# Altium PCB Copy of PCB3_1.PcbDoc
Units mm, origin at the board's own origin, x right, y up, seen from the top; angles counter-clockwise.
Board outline 66 x 100 mm, 4 copper layers (Top Layer, Int1 (GND), Int2 (PWR), Bottom Layer), stack 1.369 mm thick; 75 components, 64 nets, 288 pads, 183 vias.
Unrouted connection lines stored in the file: 38.
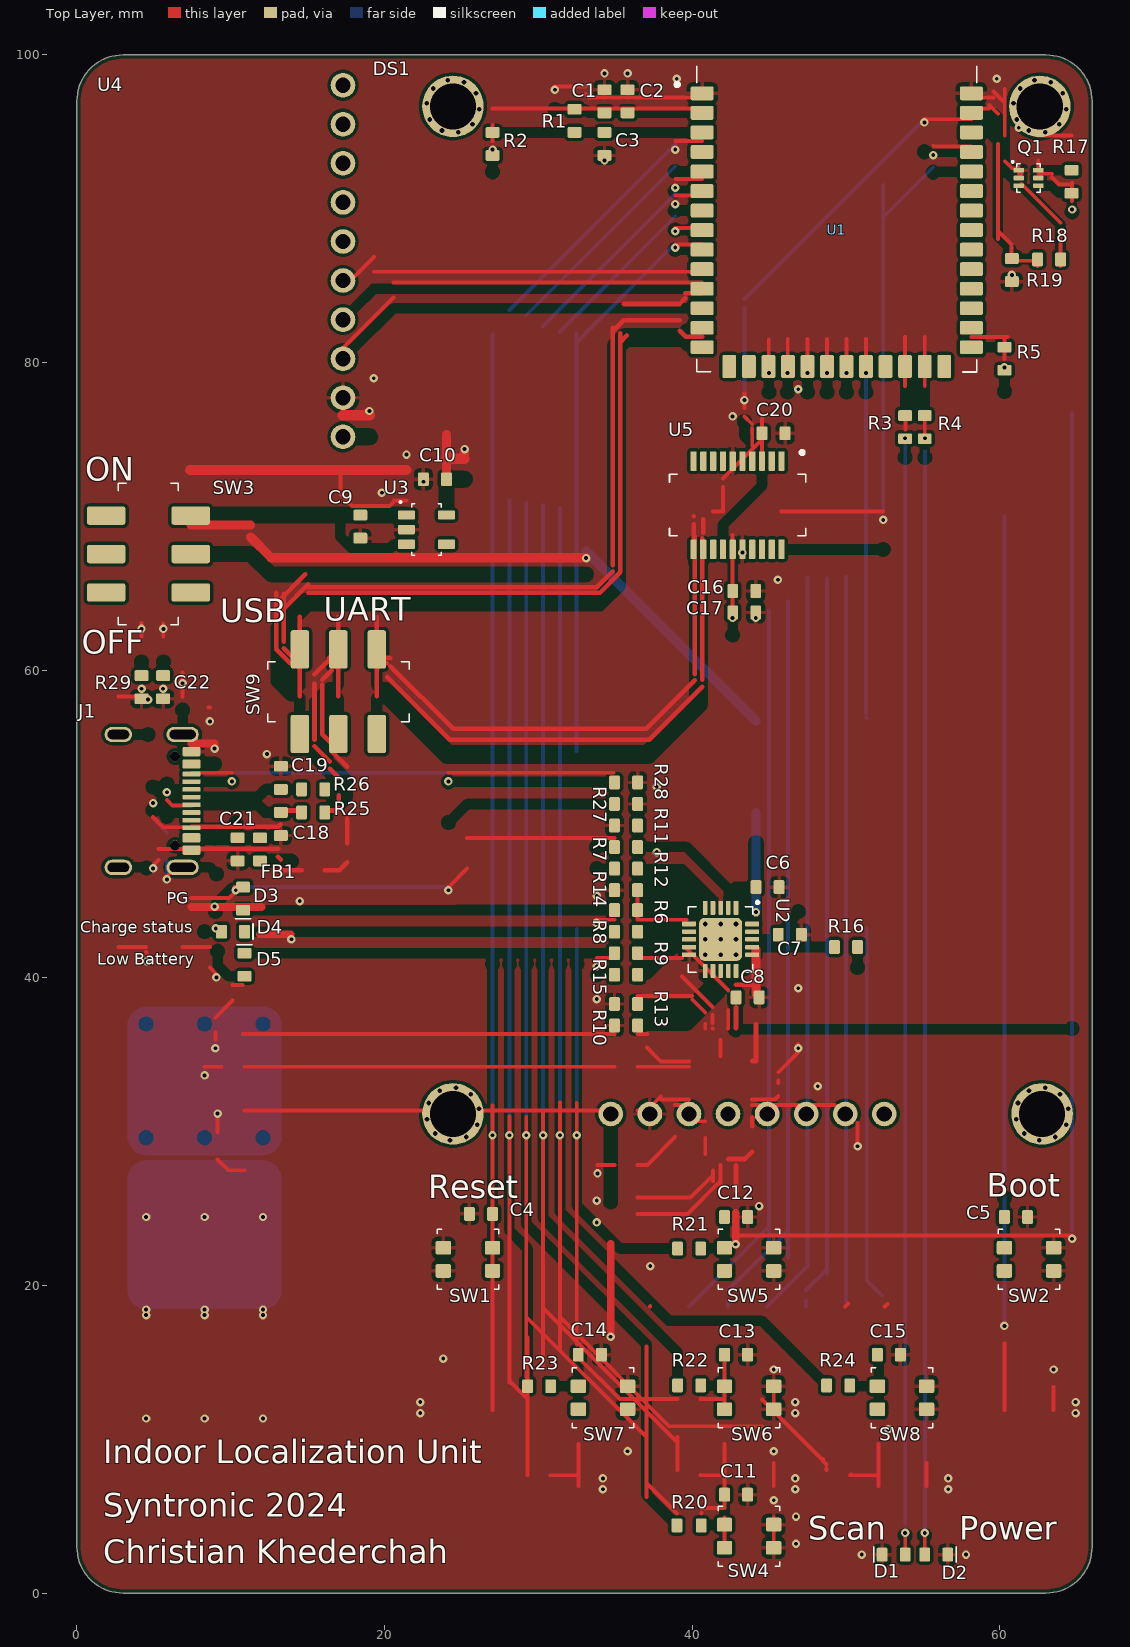
[diagram p0: Top Layer view]
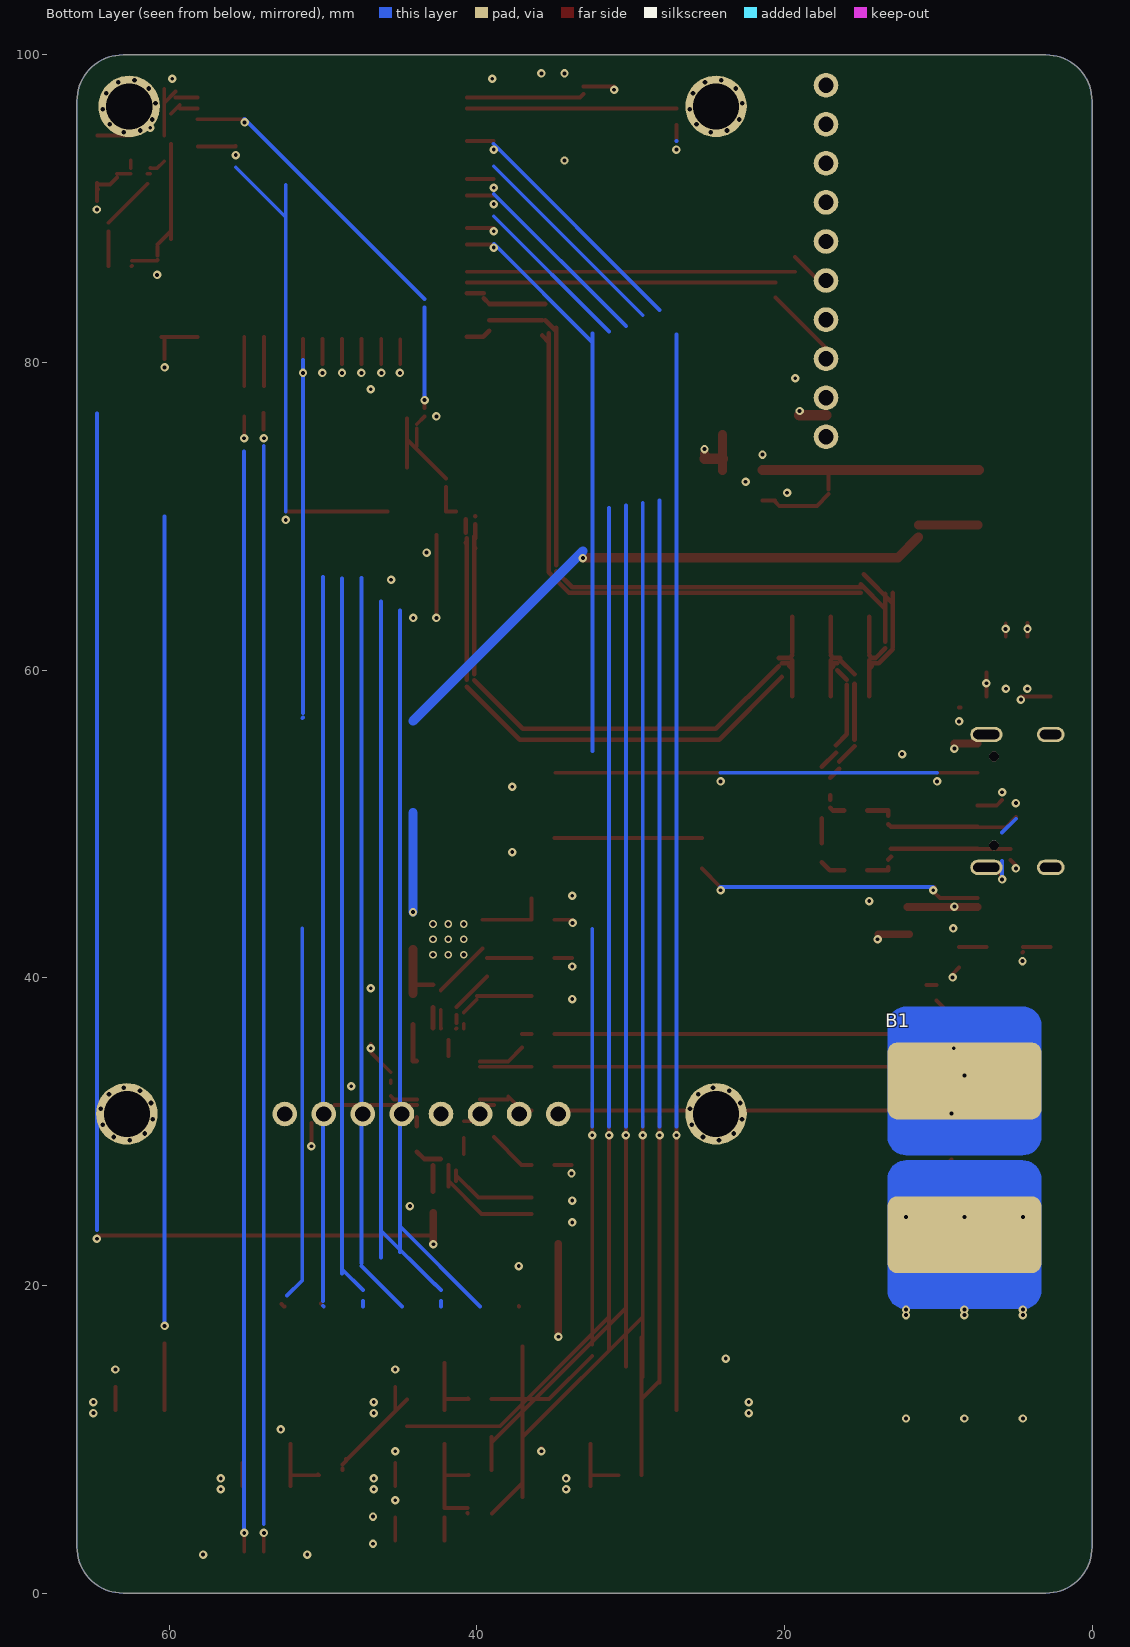
[diagram p1: Bottom Layer view, seen from below]
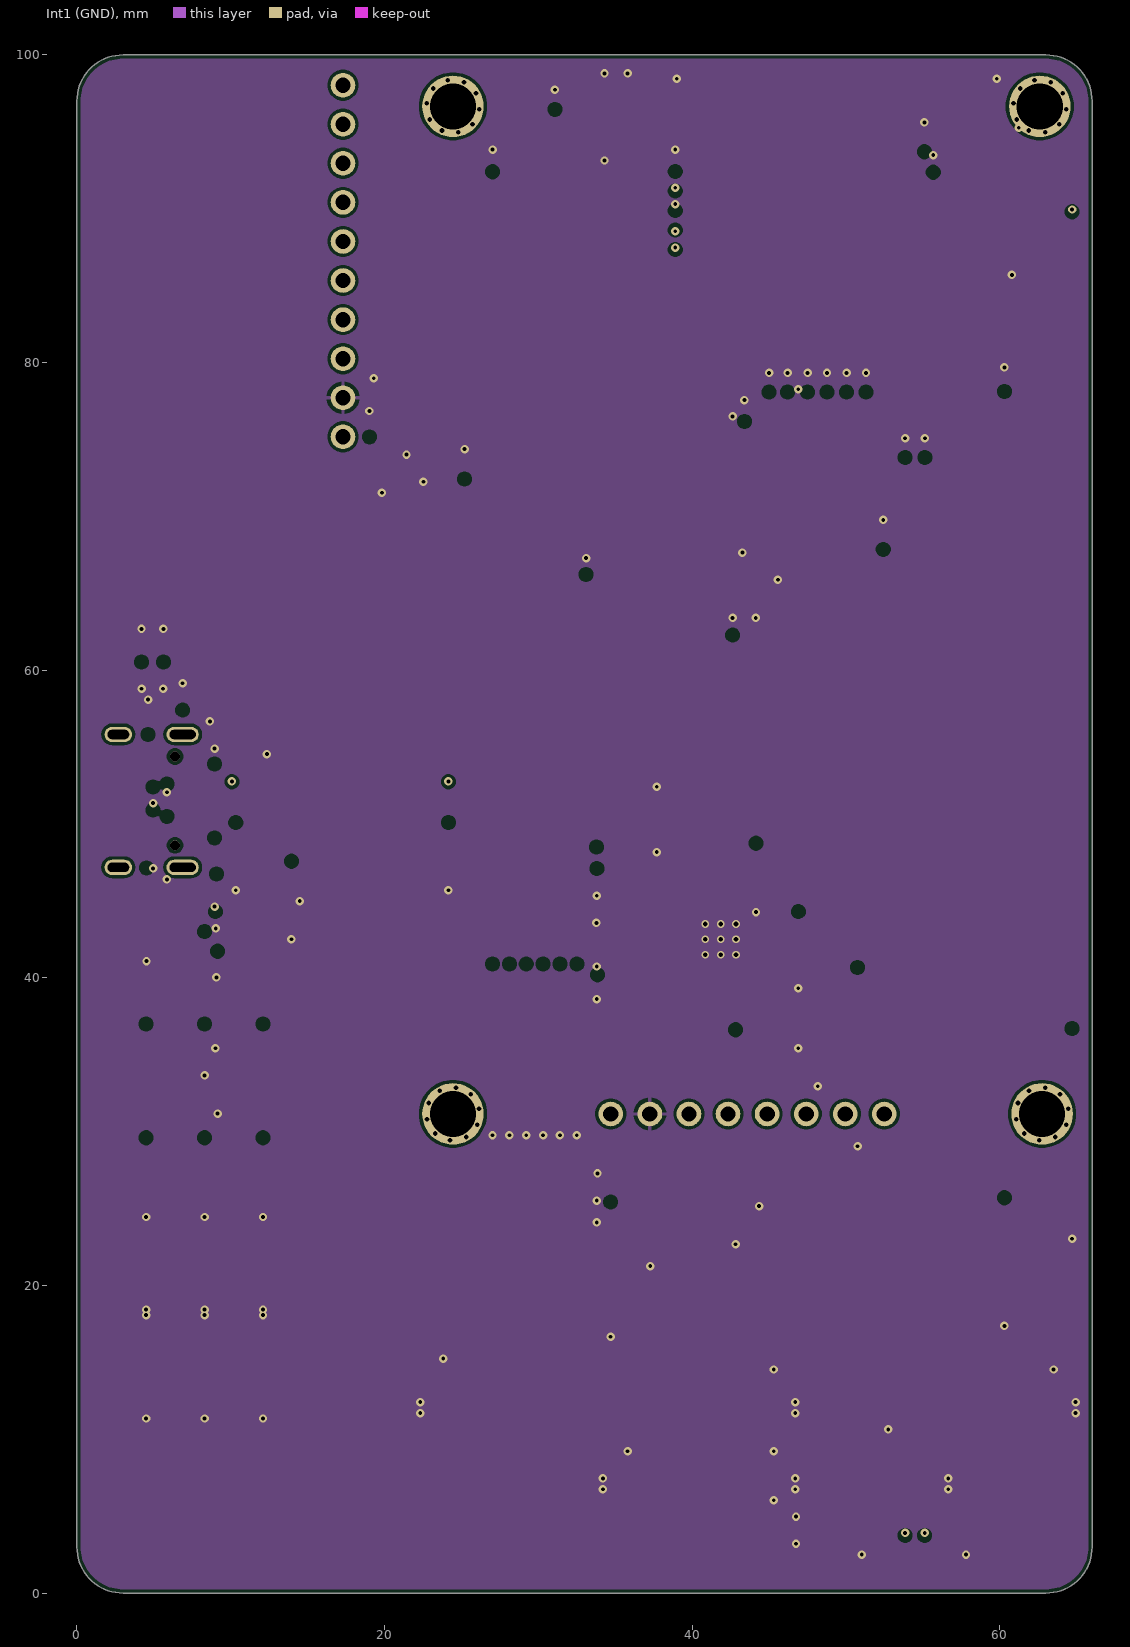
[diagram p2: Int1 (GND)]
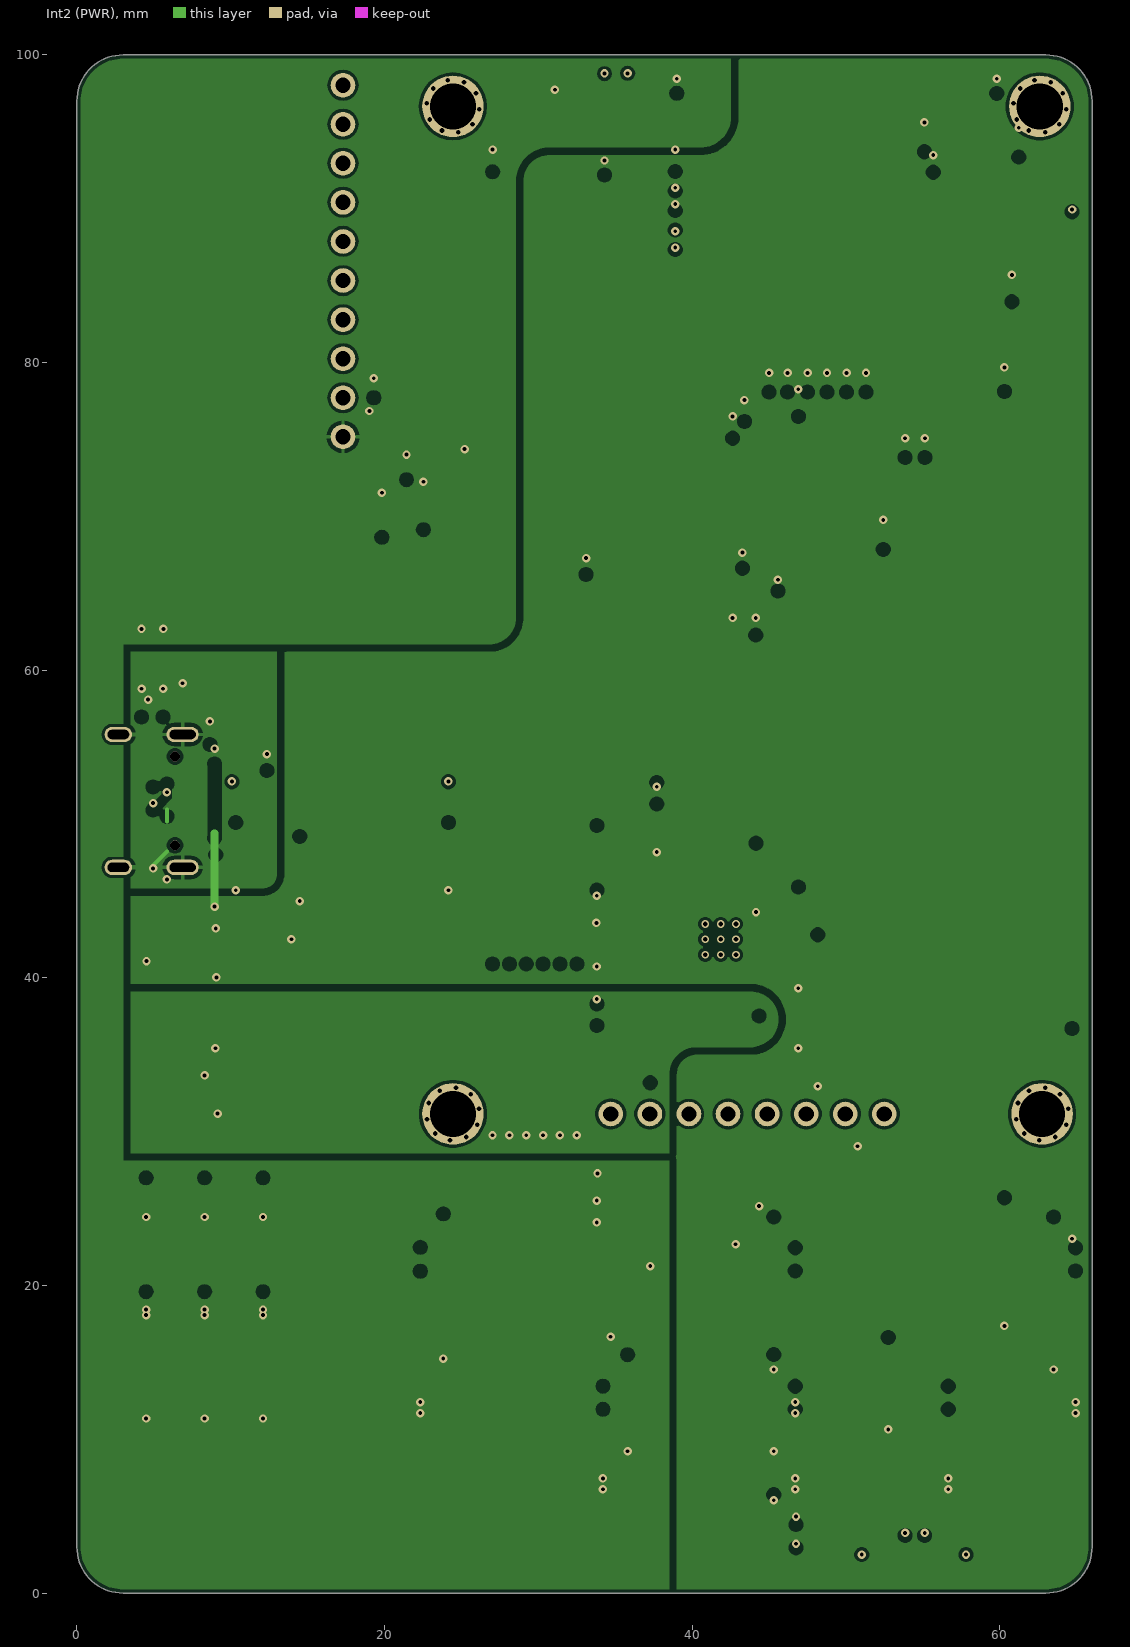
[diagram p3: Int2 (PWR)]

## Layer stack, top to bottom
Top Solder: solder mask 0.025, SM-001, Dk 4
Top Layer: signal copper 0.035
Dielectric 1: prepreg 0.1295, PP-017, Dk 4.3
Dielectric 2: prepreg 0.1295, PP-017, Dk 4.3
Int1 (GND): signal copper 0.035
Dielectric 3: core 0.7112, Core-039, Dk 4.8
Int2 (PWR): signal copper 0.035
Dielectric 4: prepreg 0.1295, PP-017, Dk 4.3
Dielectric 5: prepreg 0.1295, PP-017, Dk 4.3
Bottom Layer: signal copper 0.035
Bottom Solder: solder mask 0.025, SM-001, Dk 4

## Board outline
0,3 0,97 cw(c3,97) 3,100 63,100 cw(c63,97) 66,97 66,3 cw(c63,3) 63,0 3,0 cw(c3,3)

## Design rules (kind name [scope] priority, off if disabled: settings)
BoardOutlineClearance [All] p1: gap=0.25 ignorepadtopadclearanceinfootprint=FALSE except(0: Arc-SplitContinuation Track-SplitContinuation SMDPad-SplitContinuation THPad-SplitContinuation Via-SplitContinuation Fill-SplitContinuation Poly-SplitContinuation Region-SplitContinuation Text-SplitContinuation)
Clearance [All] p1: gap=0.2 ignorepadtopadclearanceinfootprint=FALSE except(0.5: Fill-Fill Fill-Poly Fill-Region Poly-Poly Poly-Region Region-Region)
DiffPairsRouting [All] p1: maxlimit=0.2 minlimit=0.127 mostfreqgap=0.2 toplayer_mingap=0.2 toplayer_minwidth=0.3 toplayer_maxwidth=0.3 toplayer_prefwidth=0.3 midlayer1_maxgap=0.127 midlayer1_prefgap=0.127 midlayer1_minwidth=0.113 midlayer1_maxwidth=0.113 midlayer1_prefwidth=0.113 midlayer2_maxgap=0.127 midlayer2_prefgap=0.127 midlayer2_minwidth=0.113 midlayer2_maxwidth=0.113 midlayer2_prefwidth=0.113 bottomlayer_mingap=0.2 bottomlayer_minwidth=0.3 bottomlayer_maxwidth=0.3 bottomlayer_prefwidth=0.3 impedanceprofiledriven=TRUE impedanceprofileid={8352E104-22B4-4ABE-B9B5-B5B13E8F82C1} impedanceprofilevalue=90.000000 maxuncoupledlength=2
MatchedLengths MatchedLengths_USB_DiffPairs [All] p1: tolerance=0.127 checknetsindiffpair=TRUE checkdiffpairvsdiffpair=FALSE checkxsignals=FALSE checkothers=FALSE
PolygonConnect [All] p1: thpad.connectstyle=Relief thpad.reliefconductorwidth=0.254 thpad.reliefentries=4 thpad.polygonreliefangle="90 Angle" thpad.airgapwidth=0.254 smdpad.connectstyle=Relief smdpad.reliefconductorwidth=0.254 smdpad.reliefentries=4 smdpad.polygonreliefangle="90 Angle" smdpad.airgapwidth=0.254 via.connectstyle=Direct via.reliefconductorwidth=0.254 via.reliefentries=4 via.polygonreliefangle="90 Angle" via.airgapwidth=0.254
RoutingVias [All] p1: holewidth=0.25 width=0.55 viastyle="Through Hole" minholewidth=0.25 minwidth=0.55 maxholewidth=0.25 maxwidth=0.55
SolderMaskExpansion [All] p1: expansion=0.102 istentingtop=FALSE
Width [All] p1: maxlimit=1 minlimit=0.25 preferedwidth=0.25 minimp=50.000000 maximp=50.000000 favimp=50.000000
29 further rules are at their usual default settings.

## Classes and differential pairs
component class Power: B1 C6 C7 C8 C9 C10 D3 D4 D5 Q1 R6 R7 R8 R9 R10 R11 R12 R13 R14 R15 R16 R17 R18 R19 SW3 U2 U3
component class MCU: 2 C1 C2 C3 C4 C5 D1 D2 R1 R2 R3 R4 R5 SW1 SW2 U1
component class COM: C16 C17 C18 C19 C20 C21 C22 FB1 J1 R25 R26 R27 R28 R29 SW9 U5
component class Peripherals: C11 C12 C13 C14 C15 DS1 R20 R21 R22 R23 R24 SW4 SW5 SW6 SW7 SW8 U4
differential pair C: +C_p -C_n
differential pair A: +A_p -A_n
differential pair B: +B_p -B_n
differential pair D: +D_p -D_n

## Components (designator, comment, footprint, x,y, rotation, side; value= is the part's Value field where it differs from the comment)
B1 "1200mAh" battery 8.3,28.3 r270 bottom
C1 "22 μF" "Capacitor 0603" 34.3,96.98 r270 top
C2 "0.1 μF" "Capacitor 0603" 35.8,96.98 r270 top
C3 "1 μF" "Capacitor 0603" 34.3,94.21 r90 top
C4 "0.1 μF" "Capacitor 0603" 26.27,24.65 r0 top
C5 "0.1 μF" "Capacitor 0603" 61.05,24.45 r0 top
C6 "4.7 μF" "Capacitor 0603" 44.9,45.9 r180 top
C7 "10 μF" "Capacitor 0603" 46.35,42.8 r180 top
C8 "4.7 μF" "Capacitor 0603" 43.6,38.725 r0 top
C9 "4.7 μF" "Capacitor 0603" 18.428,69.335 r90 top
C10 "4.7 μF" "Capacitor 0603" 23.278,72.41 r180 top
C11 "0.1 μF" "Capacitor 0603" 42.85,6.4 r180 top
C12 "0.1 μF" "Capacitor 0603" 42.85,24.45 r180 top
C13 "0.1 μF" "Capacitor 0603" 42.85,15.5 r180 top
C14 "0.1 μF" "Capacitor 0603" 33.35,15.5 r180 top
C15 "0.1 μF" "Capacitor 0603" 52.79,15.5 r180 top
C16 "0.1 μF" "Capacitor 0603" 43.383,65.15 r180 top
C17 "4.7 μF" "Capacitor 0603" 43.383,63.75 r180 top
C18 "47 pF" "Capacitor 0603" 13.26,50 r90 top
C19 "47 pF" "Capacitor 0603" 13.26,53 r270 top
C20 "0.1 μF" "Capacitor 0603" 45.288,75.4 r180 top
C21 "10 nF" "Capacitor 0603" 10.45,48.35 r90 top
C22 "4.7 μF" "Capacitor 0603" 5.602,58.898 r90 top
D1 "Blue" "LED 0603" 53.095,2.5 r180 top
D2 "Green" "LED 0603" 55.865,2.5 r0 top
D3 "Green" "LED 0603" 10.8,45.15 r270 top
D4 "Blue" "LED 0603" 10.15,43 r0 top
D5 "Red" "LED 0603" 10.9,40.85 r90 top
DS1 "FT231XS-R" Screen 43.6,63.9 r90 top locked
FB1 "0.6kΩ" "Ferrite Bead 0603" 11.9,48.35 r270 top
J1 "USB4105-GF-A" USB4105-GF-A 7.45,51.5 r270 top
Q1 "DMC2400UV-7" "MOSFET N/P-CH" 61.865,92 r270 top
R1 "10kΩ" "Resistor 0603"#1 32.35,95.71 r270 top
R2 "0 Ω" "Resistor 0603"#1 27.025,94.21 r90 top
R3 "50 Ω" "Resistor 0603"#1 53.845,75.8 r90 top
R4 "50 Ω" "Resistor 0603"#1 55.115,75.8 r270 top
R5 "0 Ω" "Resistor 0603"#1 60.3,80.25 r270 top
R6 "0.47kΩ" "Resistor 0603"#1 35.7,44.4 r0 top
R7 "330kΩ" "Resistor 0603"#1 35.7,48.5 r180 top
R8 "0.47kΩ" "Resistor 0603"#1 35.7,43 r0 top
R9 "0.47kΩ" "Resistor 0603"#1 35.7,41.6 r0 top
R10 "4.7kΩ" "Resistor 0603"#1 35.7,36.9 r180 top
R11 "110kΩ" "Resistor 0603"#1 35.7,49.9 r0 top
R12 "4.7kΩ" "Resistor 0603"#1 35.7,47.1 r0 top
R13 "100kΩ" "Resistor 0603"#1 35.7,38.3 r180 top
R14 "10kΩ" "Thermistor 0603" 35.7,45.7 r180 top
R15 "4.7kΩ" "Resistor 0603"#1 35.7,40.2 r0 top
R16 "4.7kΩ" "Resistor 0603"#1 50,42 r180 top
R17 "110kΩ" "Resistor 0603"#1 64.665,91.75 r90 top
R18 "30kΩ" "Resistor 0603"#1 63.2,86.7 r0 top
R19 "110kΩ" "Resistor 0603"#1 60.781,86.01 r90 top
R20 "0 Ω" "Resistor 0603"#2 39.84,4.4 r180 top
R21 "0 Ω" "Resistor 0603"#1 39.8,22.4 r180 top
R22 "0 Ω" "Resistor 0603"#1 39.8,13.5 r180 top
R23 "0 Ω" "Resistor 0603"#1 30.05,13.45 r180 top
R24 "0 Ω" "Resistor 0603"#1 49.49,13.5 r180 top
R25 "27Ω" "Resistor 0603"#1 15.36,50.75 r0 top
R26 "27Ω" "Resistor 0603"#1 15.36,52.25 r0 top
R27 "5.1kΩ" "Resistor 0603"#1 35.7,51.3 r180 top
R28 "5.1kΩ" "Resistor 0603"#1 35.7,52.7 r180 top
R29 "100kΩ" "Resistor 0603"#1 4.202,58.898 r90 top
SW1 "R-667843" R-667843 25.42,21.7 r0 top
SW2 "R-667843" R-667843 61.9,21.7 r0 top
SW3 "JS202011SCQN" JS202011SCQN 4.65,67.55 r270 top
SW4 "R-667843" R-667843 43.7,3.7 r180 top
SW5 "R-667843" R-667843 43.7,21.7 r180 top
SW6 "R-667843" R-667843 43.7,12.7 r180 top
SW7 "R-667843" R-667843 34.2,12.7 r180 top
SW8 "R-667843" R-667843 53.64,12.7 r180 top
SW9 "JS202011SCQN" JS202011SCQN 17,58.6 r180 top
U1 "ESP32-S3-WROOM-1-N16" ESP32-C3-WROOM-1 49.4,97.5 r0 top
U2 "MCP73871T-2CCI/ML" MCP73871 41.85,42.5 r270 top
U3 "TLV75533PDBVR" TLV75533PDBVR 22.728,69.135 r0 top
U4 "YUMILI1otydzvg2c" GY-9250 17.3,86.6 r180 top
U5 "FT231XS-R" FT231XS-R 42.95,70.725 r180 top

## Footprints (in the part's own frame and the unit in brackets; to place one, negate y for a bottom-side part, rotate by r counter-clockwise, add the part's x,y. Pads: shape width x height; smd on the part's side, far side on the other; paste and mask are expansions set on the pad)
battery [mm]
  rrect25% 5x10 smd: +(-5,0) -(5,0)
"Capacitor 0603" [mm] "Capacitor0603"
  rrect25% 0.7x0.9 smd: A(-0.75,0) B(0.75,0)
  body extent -0.8,-0.4 0.8,0.4, height 0.9
ESP32-C3-WROOM-1 [mm] "MCU"
  rrect25% 1.5x0.9 smd: 1(-8.75,0) 2(-8.75,-1.27) 3(-8.75,-2.54) 4(-8.75,-3.81) 5(-8.75,-5.08) 6(-8.75,-6.35) 7(-8.75,-7.62) 8(-8.75,-8.89) 9(-8.75,-10.16) 10(-8.75,-11.43) 11(-8.75,-12.7) 12(-8.75,-13.97) 13(-8.75,-15.24) 14(-8.75,-16.51) 27(8.75,-16.51) 28(8.75,-15.24) 29(8.75,-13.97) 30(8.75,-12.7) 31(8.75,-11.43) 32(8.75,-10.16) 33(8.75,-8.89) 34(8.75,-7.62) 35(8.75,-6.35) 36(8.75,-5.08) 37(8.75,-3.81) 38(8.75,-2.54) 39(8.75,-1.27) 40(8.75,0)
  rrect25% 0.9x1.5 smd: 15(-6.985,-17.757) 16(-5.715,-17.757) 17(-4.445,-17.757) 18(-3.175,-17.757) 19(-1.905,-17.757) 20(-0.635,-17.757) 21(0.635,-17.757) 22(1.905,-17.757) 23(3.175,-17.757) 24(4.445,-17.757) 25(5.715,-17.757) 26(6.985,-17.757)
  silkscreen extent -10.49,-18.12 9.1,1.78, body extent -9,-18.01 9,7.49, height 3.25
"Ferrite Bead 0603" [mm] "Ferrite Bead 0603"
  rrect25% 0.7x0.9 smd: A(-0.75,0) B(0.75,0)
  body extent -0.8,-0.4 0.8,0.4, height 0.95
FT231XS-R [mil] "USB to UART Bridge"
  rrect25% 16x50 smd: 1(-112.5,-113) 2(-87.5,-113) 3(-62.5,-113) 4(-37.5,-113) 5(-12.5,-113) 6(12.5,-113) 7(37.5,-113) 8(62.5,-113) 9(87.5,-113) 10(112.5,-113) 11(112.5,113) 12(87.5,113) 13(62.5,113) 14(37.5,113) 15(12.5,113) 16(-12.5,113) 17(-37.5,113) 18(-62.5,113) 19(-87.5,113) 20(-112.5,113)
  silkscreen extent -174,-139 174,79, body extent -170,-118 171,118, height 69
GY-9250 [mm] "IMU"
  round 1.6 hole 1: 1(0,11.43) 2(0,8.89) 3(0,6.35) 4(0,3.81) 5(0,1.27) 6(0,-1.27) 7(0,-3.81) 8(0,-6.35) 9(0,-8.89) 10(0,-11.43)
  body extent -1.5,-12.7 13.5,12.7, height 6.1
JS202011SCQN [mm] "SWITCH SLIDE DPDT 300MA 6V"
  rrect25% 1.2x2.5 smd: 1(-2.5,-2.75) 2(0,-2.75) 3(2.5,-2.75) 4(-2.5,2.75) 5(0,2.75) 6(2.5,2.75)
  silkscreen extent -4.6,-1.95 4.6,1.95, body extent -4.5,-3.75 4.5,3.75, height 5.51
"LED 0603" [mm] "Resistor 0603"
  rrect25% 0.7x0.9 smd: A(-0.75,0) B(0.75,0)
  silkscreen extent 1.3,-0.5 1.3,0.5, body extent -0.8,-0.4 0.8,0.4, height 0.35
MCP73871 [mm]
  rrect25% 0.9x0.3 smd: 1(-2.05,1) 2(-2.05,0.5) 3(-2.05,0) 4(-2.05,-0.5) 5(-2.05,-1) 11(2.05,-1) 12(2.05,-0.5) 13(2.05,0) 14(2.05,0.5) 15(2.05,1)
  rrect25% 0.3x0.9 smd: 6(-1,-2.05) 7(-0.5,-2.05) 8(0,-2.05) 9(0.5,-2.05) 10(1,-2.05) 16(1,2.05) 17(0.5,2.05) 18(0,2.05) 19(-0.5,2.05) 20(-1,2.05)
  rrect25% 2.8x2.8 smd: 21(0,0)
  silkscreen extent -2.45,-2.1 2.12,2.45, body extent -2,-2 2,2, height 1
"MOSFET N/P-CH" [mm] "MOSFET N/P-CH"
  rrect25% 0.3x0.67 smd: 1(-0.5,-0.635) 2(0,-0.635) 3(0.5,-0.635) 4(-0.5,0.635) 5(0,0.635) 6(0.5,0.635)
  silkscreen extent -1.05,-1.03 0.91,0.76, body extent -0.8,-0.8 0.8,0.8, height 0.6
R-667843 [mm] "SWITCH TACTILE SPST-NO 0.05A 12V"
  rrect25% 1x0.9 smd: A(-1.6,-0.75) A(-1.6,0.75) B(1.6,-0.75) B(1.6,0.75)
  silkscreen extent -2,-1.95 2,1.95, body extent -1.95,-1.9 1.95,1.9, height 1.5
"Resistor 0603"#1 [mm] "Resistor 0603"
  rrect25% 0.7x0.9 smd: A(-0.75,0) B(0.75,0)
  body extent -0.8,-0.4 0.8,0.4, height 0.55
"Resistor 0603"#2 [mm] "Resistor 0603"
  rrect25% 0.7x0.9 smd: A(-0.75,0) B(0.83,0)
  body extent -0.8,-0.4 0.8,0.4, height 0.55
Screen [mm]
  round 1.6 hole 1: 1(-32.75,8.89) 2(-32.75,6.35) 3(-32.75,3.81) 4(-32.75,1.27) 5(-32.75,-1.27) 6(-32.75,-3.81) 7(-32.75,-6.35) 8(-32.75,-8.89)
  round 4 hole 3: X(-32.75,-19.15) X(-32.75,19.15) X(32.75,-19) X(32.75,19.15)
  body extent -35.25,-21.65 35.25,21.65, height 7
"Thermistor 0603" [mm] "Thermistor 0603"
  rrect25% 0.7x0.9 smd: A(-0.75,0) B(0.75,0)
  body extent -0.8,-0.4 0.8,0.4, height 0.9
TLV75533PDBVR [mm] "IC REG LINEAR 3.3V 500MA SOT23-5"
  rrect25% 1.1x0.6 smd: 1(-1.3,0.95) 2(-1.3,0) 3(-1.3,-0.95) 4(1.3,-0.95) 5(1.3,0.95)
  silkscreen extent -1.7,-1.67 0.96,1.8, body extent -1.4,-1.45 1.4,1.45, height 1.45
USB4105-GF-A [mm] "CONN RCPT TYPE C 6P SMD RA"
  round 0.65 hole 0.65 unplated: 36(-2.89,-1.075) 36(2.89,-1.075)
  rrect25% 0.6x1.15 smd: A1(-3.2,0) A4(-2.4,0) B1(3.2,0) B4(2.4,0)
  rrect25% 0.3x1.15 smd: A5(-1.25,0) A6(-0.25,0) A7(0.25,0) A8(1.25,0) B5(1.75,0) B6(0.75,0) B7(-0.75,0) B8(-1.75,0)
  oval 1x2.1 hole 0.6 slot 1.7 at 90 deg: SHELL(-4.32,-0.575) SHELL(4.32,-0.575)
  oval 1x1.8 hole 0.6 slot 1.4 at 90 deg: SHELL(-4.32,-4.755) SHELL(4.32,-4.755)
  body extent -4.47,-7.35 4.47,0.36, height 3.31

## Part data
B1: library part Battery, "Lipobatteri - 103040 - 1.200 mAh", Manufacturer=batterikungen, Manufacturer Part Number=103040, Supplier Part Number 1=827-016, Supplier 1=Batterikungen
C1: library part "22 μF 0603", "Capacitor 22 μF", Manufacturer="Murata Electronics", Manufacturer Part Number=GRM188R60G226MEA0D, Supplier Part Number 1=490-5526-1-ND, Supplier 1=Digikey
C2 C4 C5 C11 C12 C13 C14 C15 C16 C20: library part "0.1 μF 0603", "Capacitor 0.1 μF", Manufacturer="Samsung Electro-Mechanics", Manufacturer Part Number=CL10B104KB8NNWC, Supplier Part Number 1=1276-1935-1-ND, Supplier 1=Digikey
C3: library part "1 μF 0603", "Capacitor 1 μF", Manufacturer="Samsung Electro-Mechanics", Manufacturer Part Number=CL10A105KA8NNNC, Supplier Part Number 1=1276-1102-1-ND, Supplier 1=Digikey
C6 C8 C9 C10 C17 C22: library part "4,7 μF 0603", "Capacitor 4.7 μF", Manufacturer="Samsung Electro-Mechanics", Manufacturer Part Number=CL10A475KP8NNNC, Supplier Part Number 1=1276-1044-1-ND, Supplier 1=Digikey
C7: library part "10 μF 0603", "Capacitor 10 μF", Manufacturer="Samsung Electro-Mechanics", Manufacturer Part Number=CL10A106MQ8NNNC, Supplier Part Number 1=1276-1119-1-ND, Supplier 1=Digikey
C18 C19: library part "47 pF 0603", "Capacitor 47 pF", Manufacturer="Walsin Technology Corporation", Manufacturer Part Number=0603N470J500CT, Supplier Part Number 1=1292-1528-1-ND, Supplier 1=Digikey
C21: library part "10 nF 0603", "Capacitor 10 nF", Manufacturer="Samsung Electro-Mechanics", Manufacturer Part Number=CL10B103KB8NNNC, Supplier Part Number 1=1276-1009-1-ND, Supplier 1=Digikey
D1 D4: library part D.Blue, "Diode Blue", Manufacturer="Lite-On Inc.", Manufacturer Part Number=LTST-C193TBKT-5A, Supplier Part Number 1=160-1827-1-ND, Supplier 1=Digikey
D2 D3: library part D.Green, "Diode Green", Manufacturer="Lumex Opto/Components Inc.", Manufacturer Part Number=SML-LXFT0603GC-TR, Supplier Part Number 1=67-SML-LXFT0603GC-TRCT-ND, Supplier 1=Digikey
D5: library part D.Red, "Diode Red", Manufacturer="Lite-On Inc.", Manufacturer Part Number=LTST-C190KRKT, Supplier Part Number 1=160-1436-1-ND, Supplier 1=Digikey
DS1: library part LCD-screen, "240×320, General 2.4inch LCD Display Module, 65K RGB", Manufacturer="FTDI, Future Technology Devices International Ltd", Supplier Part Number 1=768-1129-1-ND, Manufacturer Part Number=FT231XS-R, Supplier 1=Waveshare
FB1: library part "FB 0.6 kΩ 0603", "Ferrite Bead 600 Ω", Manufacturer="Murata Electronics", Manufacturer Part Number=BLM18AG601SN1D, Supplier Part Number 1=490-1014-1-ND, Supplier 1=Digikey
J1: "CONN RCPT TYPE C 6P SMD RA", Manufacturer=GCT, Supplier Part Number 1=2073-USB4105-GF-ACT-ND, Manufacturer Part Number=USB4105-GF-A, Supplier 1=Digikey
Q1: "MOSFET N/P-CH 20V SOT563", Manufacturer="Diodes Incorporated", Supplier Part Number 1=DMC2400UV-7DICT-ND, Manufacturer Part Number=DMC2400UV-7, Supplier 1=Digikey
R1: library part "10 kΩ 0603", "Resistor 10000 Ω", Manufacturer="Stackpole Electronics Inc", Manufacturer Part Number=RMCF0603FT10K0, Supplier Part Number 1=RMCF0603FT10K0CT-ND, Supplier 1=Digikey
R2 R5 R20 R21 R22 R23 R24: library part "0 Ω 0603", "Resistor 0 Ω", Manufacturer="Stackpole Electronics Inc", Manufacturer Part Number=RMCF0603ZT0R00, Supplier Part Number 1=RMCF0603ZT0R00CT-ND, Supplier 1=Digikey
R3 R4: library part "0.05 kΩ 0603", "Resistor 50 Ω", Manufacturer="Vishay Dale", Manufacturer Part Number=CRCW060350R0FKEA, Supplier Part Number 1=541-3318-1-ND, Supplier 1=Digikey
R6 R8 R9: library part "0.47 kΩ 0603", "Resistor 470 Ω", Manufacturer="Stackpole Electronics Inc", Manufacturer Part Number=RMCF0603FT470R, Supplier Part Number 1=RMCF0603FT470RCT-ND, Supplier 1=Digikey
R7: library part "330 kΩ 0603", "Resistor 330000 Ω", Manufacturer=YAGEO, Manufacturer Part Number=RC0603JR-07330KL, Supplier Part Number 1=311-330KGRCT-ND, Supplier 1=Digikey
R10 R12 R15 R16: library part "4.7 kΩ 0603", "Resistor 4700 Ω", Manufacturer="Stackpole Electronics Inc", Manufacturer Part Number=RMCF0603FT4K70, Supplier Part Number 1=RMCF0603FT4K70CT-ND, Supplier 1=Digikey
R11 R17 R19: library part "110 kΩ 0603", "Resistor 110000 Ω", Manufacturer="Stackpole Electronics Inc", Manufacturer Part Number=RMCF0603FT110K, Supplier Part Number 1=RMCF0603FT110KCT-ND, Supplier 1=Digikey
R13 R29: library part "100 kΩ 0603", "Resistor 100000 Ω", Manufacturer="Stackpole Electronics Inc", Manufacturer Part Number=RMCF0603FT100K, Supplier Part Number 1=RMCF0603FT100KCT-ND, Supplier 1=Digikey
R14: library part "NTC 10 KΩ 0603", "Thermistor 10000 Ω", Manufacturer="Panasonic Electronic Components", Manufacturer Part Number=ERT-J1VR103J, Supplier Part Number 1=P10547CT-ND, Supplier 1=Digikey
R18: library part "30 kΩ 0603", "Resistor 30000 Ω", Manufacturer=YAGEO, Manufacturer Part Number=RC0603FR-0730KL, Supplier Part Number 1=311-30.0KHRCT-ND, Supplier 1=Digikey
R25 R26: library part "27 Ω 0603", "Resistor 27 Ω", Manufacturer="Stackpole Electronics Inc", Manufacturer Part Number=RMCF0603FT27R0, Supplier Part Number 1=RMCF0603FT27R0CT-ND, Supplier 1=Digikey
R27 R28: library part "5.1 kΩ 0603", "Resistor 5100 Ω", Manufacturer="Stackpole Electronics IncStackpole Electronics Inc", Manufacturer Part Number=RMCF0603FT5K10, Supplier Part Number 1=RMCF0603FT5K10CT-ND, Supplier 1=Digikey
SW1 SW2 SW4 SW5 SW6 SW7 SW8: "SWITCH TACTILE SPST-NO 0.05A 12V", Manufacturer="Mitsumi Electric Company Ltd", Supplier Part Number 1=2508-R-667843CT-ND, Manufacturer Part Number=R-667843, Supplier 1=Digikey
SW3 SW9: "SWITCH SLIDE DPDT 300MA 6V", Manufacturer=C&K, Supplier Part Number 1=401-2002-1-ND, Manufacturer Part Number=JS202011SCQN, Supplier 1=Digikey
U1: "RF TXRX MODULE BT PCB TRACE SMD", Manufacturer="Espressif Systems", Supplier Part Number 1=1965-ESP32-S3-WROOM-1-N16CT-ND, Manufacturer Part Number=ESP32-S3-WROOM-1-N16, Supplier 1=Digikey
U2: library part MCP73871, "IC BATT CHG LI-ION 1CELL 20QFN", Manufacturer="Microchip Technology", Supplier Part Number 1=MCP73871T-2CCI/MLDKR-ND, Manufacturer Part Number=MCP73871T-2CCI/ML, Supplier 1=Digikey
U3: "IC REG LINEAR 3.3V 500MA SOT23-5", Manufacturer="Texas Instruments", Supplier Part Number 1=296-50411-1-ND, Manufacturer Part Number=TLV75533PDBVR, Supplier 1=Digikey
U4: library part GY-9250, "YUMILI Gyroskopmodul MPU-9250 GY-9250 9-axel 16-bitars", Manufacturer=YUMILI, Supplier Part Number 1=B09XZQNQBV, Manufacturer Part Number=YUMILI1otydzvg2c, Supplier 1=Amazon
U5: library part FT231XS-R_1, "IC USB SERIAL FULL UART 20SSOP", Manufacturer="FTDI, Future Technology Devices International Ltd", Supplier Part Number 1=768-1129-1-ND, Manufacturer Part Number=FT231XS-R, Supplier 1=Digikey

## Via types
v1: diameter 0.55, hole 0.25, Top Layer to Bottom Layer, 130 vias
v2: diameter 0.4, hole 0.3, Top Layer to Bottom Layer, 44 vias
v3: diameter 0.5, hole 0.3, Top Layer to Bottom Layer, 9 vias

## Nets (pads, with @x,y where several pads share a name; then routed paths per layer and width w, separated by ;. In a path a pad name is that pad's centre, name@x,y a point inside that pad or via, vN(x,y) a via of type N, cw(c..) or ccw(c..) an arc to the next point about the centre after c; other vN are vias at no path point)
+3V3: C1.B C2.B C10.A DS1.1 R1.A U1.2 U3.5 U4.1 | length 20.6
  Top Layer w0.25: v1@31.075,97.942 33.065,97.942 ; 33.065,97.464 33.295,97.234 35.8,97.234 40.65,97.234
  Top Layer w0.5: 34.71,16.991 34.71,22.706
  Top Layer w0.6: 24.028,72.98 24.028,75.305 ; 25.185,74.042 25.2,74.056
  Top Layer w0.7: 17.3,76.57 19.02,76.57 ; 24.028,73.738 25.185,73.738
  other v1: 34.7,16.662 25.2,74.371 19.02,76.849 31.075,97.738
A_n: SW9.4 U5.12 | length 36.8
  Top Layer w0.3: 19.5,58.314 19.5,60.638 ; 19.5,60.084 19.676,60.26 ; 19.676,60.438 20.175,60.438 ; 20.175,59.556 24.25,55.481 37.221,55.481 40.664,58.924 ; 40.664,59.376 40.664,68.572 ; U5.12@40.664,68.227 U5.12@40.728,68.291 ; 40.728,68.935 40.728,69.812
A_p: SW9.1 U5.11 | length 36
  Top Layer w0.3: SW9.1@19.5,60.968 19.676,60.792 20.382,60.792 ; SW9.1@19.5,61.146 19.5,63.47 ; 20.382,60.265 24.457,56.19 37.014,56.19 40.164,59.34 ; 40.093,70.005 40.1,69.997 ; U5.11@40.1,67.937 U5.11@40.164,67.873 ; 40.1,68.581 40.1,69.478 ; 40.164,59.73 40.164,68.691
B_n: SW9.6 U1.13 | length 52.7
  Top Layer w0.3: 12.95,61.357 13.869,60.438 14.324,60.438 ; 12.95,61.5 12.95,65.014 ; 12.95,64.333 14.843,66.225 ; 14.324,60.26 14.5,60.084 ; 14.5,58.314 14.5,60.638 ; 14.843,65.395 33.803,65.395 34.825,66.417 ; 34.825,66.811 34.825,82.264 ; 34.825,82.035 35.55,82.76 ; 35.55,83.805 39.175,83.805 39.56,84.19 ; 39.56,84.513 40.65,84.513
B_p: SW9.3 U1.14 | length 51
  Top Layer w0.3: 13.45,61.418 14.076,60.792 14.324,60.792 SW9.3@14.5,60.968 ; 13.45,61.854 13.45,64.953 ; 13.45,63.978 15.05,65.578 ; SW9.3@14.5,61.146 14.5,63.47 ; 15.05,65.041 34.01,65.041 35.325,66.356 ; 35.325,66.457 35.325,81.909 ; 35.325,81.327 35.757,81.759 ; 35.757,82.743 39.2,82.743 ; 39.2,82.066 39.585,81.681 40.65,81.681
C_n: R25.B SW9.5 | length 12.5
  Top Layer w0.3: 15.95,55.829 SW9.5@16.651,55.127 ; 15.95,55.835 15.95,59.058 ; 15.95,59.376 16.576,60.002 ; 16.11,46.984 17.049,46.984 17.575,47.51 ; 16.576,60.438 16.824,60.438 ; SW9.5@16.652,54.634 17.575,53.711 ; 16.824,60.26 17,60.084 ; 17,58.314 17,60.638 ; 17.575,48.755 17.575,50.356
C_p: R26.B SW9.2 | length 11.5
  Top Layer w0.3: 15.45,55.06 16.444,54.065 ; 15.45,55.481 15.45,59.118 ; 15.45,59.73 16.369,60.649 ; 16.11,50.879 16.849,50.879 17.025,51.055 ; 16.369,60.792 16.824,60.792 SW9.2@17,60.968 ; 16.445,53.583 17.025,53.003 ; SW9.2@17,61.146 17,63.47 ; 17.025,51.587 17.025,51.881
D_n: C18.B J1.A7 J1.B7 R25.A | length 13.9
  Top Layer w0.25: v1@4.95,47.313 5.3,47.663 ; 5.3,48.376 7.45,48.376 ; 5.85,51.558 6.2,51.208 J1.A7@7.45,51.208
  Top Layer w0.3: 7.45,48.401 13.074,48.401 ; 13.074,47.868 13.25,47.693 ; 13.26,47.181 13.26,46.984 14.61,46.984
  Int2 (PWR) w0.25: v1@4.95,47.313 5.85,48.213 ; 5.85,50.146 5.85,50.946
  other v1: 4.95,47.109 5.85,52.066
D_p: C19.B J1.A6 J1.B6 R26.A | length 14.3
  Top Layer w0.25: 4.95,50.452 5.61,49.792 7.45,49.792 ; v1@5.85,46.605 6.1,46.855 ; 6.1,46.959 7.45,46.959
  Top Layer w0.3: 7.45,49.817 13.074,49.817 13.25,49.992 ; 13.25,50.525 13.25,50.839 ; 13.25,50.879 13.26,50.889 ; 13.26,50.879 14.61,50.879
  Bottom Layer w0.25: 4.95,50.338 5.85,49.438 ; v1@5.85,46.605 5.85,47.615
  other v1: 5.85,46.401 4.95,51.358
GND: B1.- C1.A C2.A C3.A C4.A C5.B C6.A C7.A C8.B C9.A C10.B C11.A C12.A C13.A C14.A C15.A C16.A C17.A C18.A C19.A C20.A C21.A C22.A D1.B D2.B DS1.2 J1.A1 J1.B1 Q1.1 R10.B R11.A R13.B R14.B R19.A R27.A R28.A R29.A SW1.A SW2.B SW4.A SW5.A SW6.A SW7.A SW8.A U1.1 U1.40 U2.3 U2.10 U2.11 U2.21 U3.2 U4.2 U5.6 U5.16 | length 10.8
  Top Layer w0.25: 8.563,57.581 8.644,57.581 ; 37.25,18.636 37.275,18.661 ; 39.8,30.673 40.85,30.673 ; 40.85,28.549 40.85,29.599 ; 41.85,34.922 41.85,35.972 ; 45.3,3.412 45.3,4.912 ; 45.3,6.953 45.3,8.453 ; SW6.A@45.3,11.909 SW6.A@45.3,13.409 ; 55.24,6.953 55.24,8.453 ; 63.5,11.909 63.5,13.409
  other v1: 51.025,2.5 57.8,2.5 46.75,3.208 46.75,4.978 45.3,6.04 34.2,6.749 46.7,6.749 56.65,6.749 34.2,7.457 46.7,7.457 56.65,7.457 35.8,9.227 45.3,9.227 52.75,10.643 4.5,11.351 8.3,11.351 12.1,11.351 22.325,11.705 46.7,11.705 64.925,11.705 22.325,12.413 46.7,12.413 64.925,12.413 45.3,14.537 63.5,14.537 23.82,15.246 4.5,18.078 8.3,18.078 12.1,18.078 37.275,21.264 33.8,24.097 44.355,25.159 33.8,25.513 48.165,32.948 33.8,38.612 46.9,39.32 9.025,43.215 14.485,44.985 33.8,45.339 37.7,48.172 37.7,52.42 12.35,54.544 8.644,56.669 4.202,58.793 5.602,58.793 44.133,63.395 45.575,65.874 43.268,67.644 19.828,71.538 22.528,72.246 21.428,74.017 42.633,76.495 46.9,78.265 19.3,78.973 60.781,85.7 34.3,93.135 61.23,95.259 39,98.446 59.8,98.446 34.3,98.8 35.8,98.8
  other v3: 40.85,41.5 41.85,41.5 42.85,41.5 40.85,42.5 41.85,42.5 42.85,42.5 40.85,43.5 41.85,43.5 42.85,43.5
NetC3_B: C3.B R1.B R2.B U1.3 | length 13.6
  Top Layer w0.25: 27.025,96.525 34.3,96.525 40.65,96.525
NetC4_B: C4.B R2.A SW1.B | length 72.4
  Top Layer w0.25: 27.02,11.909 27.02,13.409 ; 27.02,13.325 27.02,15.445 ; 27.02,15.45 27.02,31.7 ; 27.025,94.401 27.025,95.461
  Bottom Layer w0.25: 27.02,30.319 27.023,30.322 ; 27.023,30.319 27.023,81.814 ; 27.023,94.401 27.025,94.404
  other v1: 27.02,29.761 27.025,93.843
NetC5_A: C5.A R5.B SW2.A | length 58.5
  Top Layer w0.25: 60.3,11.909 60.3,13.409 ; 60.3,12.971 60.3,16.221 ; 60.3,80.239 60.3,81.614
  Bottom Layer w0.25: v1@60.3,17.574 60.3,69.999
  other v1: 60.3,17.37 60.3,79.681
NetC9_B: C9.B SW3.4 U3.1 U3.3 | length 20.2
  Top Layer w0.25: 17.128,71.447 17.894,70.68 20.335,70.68 20.61,70.955 ; 17.128,71.742 17.128,73.151 ; 20.61,71.034 21.428,71.034
  Top Layer w0.65: 7.35,73.005 17.128,73.005 18.428,73.005 21.428,73.005
NetC11_B: C11.B R20.A SW4.B | length 5
  Top Layer w0.25: 40.59,5.182 40.615,5.207 ; 40.615,5.536 42.075,5.536 42.1,5.561 ; 42.1,3.412 42.1,4.912 ; 42.1,5.536 42.1,7.486
NetC12_B: C12.B R21.A SW5.B | length 5.1
  Top Layer w0.25: 40.55,12.617 40.575,12.642 ; 40.575,12.617 42.075,12.617 42.1,12.642 ; 42.1,11.909 42.1,13.409 ; 42.1,12.971 42.1,14.971
NetC13_B: C13.B R22.A SW6.B | length 5.1
  Top Layer w0.25: 40.55,7.686 40.575,7.661 42.075,7.661 ; 42.075,7.686 42.1,7.661 42.1,9.711 ; 42.1,6.953 42.1,8.453
NetC14_B: C14.B R23.A SW7.B | length 5.4
  Top Layer w0.25: 30.8,7.661 32.6,7.661 32.6,9.711 ; 32.6,6.953 32.6,8.453
NetC15_B: C15.B R24.A SW8.B | length 5.4
  Top Layer w0.25: 50.24,7.661 52.04,7.661 ; 50.32,7.661 50.32,7.711 ; 52.12,6.953 52.12,8.453 ; 52.12,7.661 52.12,9.711
NetC20_B: C20.B U5.3 U5.13 U5.14 | length 9.2
  Top Layer w0.25: 41.363,70.326 41.998,70.326 41.998,71.926 ; 41.998,72.451 C20.B@44.538,74.991 ; U5.3@44.538,73.159 44.538,74.759 ; 44.538,74.575 44.538,76.38
NetC22_B: C22.B J1.SHELL R29.B | length 9.5
  Top Layer w0.25: 2.695,42.003 4.495,42.003 ; 2.695,58.289 v1@4.625,58.289 ; v1@4.2,62.892 v1@4.201,62.891 ; 4.201,62.183 4.201,63.058 ; 4.495,41.679 4.525,41.649 ; 5.614,62.183 5.614,63.037 ; v1@5.614,62.891 v1@5.625,62.903 ; 6.875,42.003 8.647,42.003 ; 6.875,58.289 6.875,59.869 ; 8.647,40.66 v1@9.075,40.233
  other v1: 9.075,40.029 4.525,41.091 4.625,58.085 6.875,59.147 4.2,62.687 5.625,62.687
NetD1_A: D1.A R3.A | length 72.4
  Top Layer w0.25: D1.A@53.847,2.704 v1@53.847,3.949 ; 53.872,75.637 53.872,76.732
  Bottom Layer w0.25: 53.847,4.474 53.847,74.569
  other v1: 53.845,3.916 53.845,75.079
NetD2_A: D2.A R4.B | length 72.6
  Top Layer w0.25: D2.A@55.115,2.704 v1@55.115,3.954 ; R4.B@55.12,75.283 55.12,76.498
  Bottom Layer w0.25: v1@55.125,4.12 55.125,74.22
  other v1: 55.115,3.916 55.125,75.079
NetD3_B: D3.B R6.A | length 24.1
  Top Layer w0.25: 10.8,36.338 24.622,36.338 24.625,36.341 ; 24.625,36.338 34.947,36.338
NetD4_B: D4.B R8.A | length 24
  Top Layer w0.25: 10.9,34.214 34.95,34.214
NetD5_B: D5.B R9.A | length 24
  Top Layer w0.25: 10.9,31.382 34.95,31.382
NetDS1_3: DS1.3 U1.17 | length 50.7
  Top Layer w0.25: U1.17@44.977,79.885 44.977,81.514
  Bottom Layer w0.25: 39.79,18.636 45,23.846 ; 45,22.176 45,63.891
  other v1: 45,79.327
NetDS1_4: DS1.4 U1.18 | length 50.2
  Top Layer w0.25: U1.18@46.213,79.885 46.213,81.524
  Bottom Layer w0.25: 42.33,18.636 42.33,19.001 ; 42.33,19.698 42.721,20.089 ; 42.721,20.067 42.721,20.052 46.225,23.556 ; 46.225,21.822 46.225,64.472
  other v1: 46.2,79.327
NetDS1_5: DS1.5 U1.19 | length 49.9
  Top Layer w0.25: U1.19@47.497,79.885 47.497,81.534
  Bottom Layer w0.25: 44.87,18.636 47.5,21.266 ; 47.5,21.468 47.5,65.988
  other v1: 47.5,79.327
NetDS1_6: DS1.6 U1.20 | length 49.1
  Top Layer w0.25: U1.20@48.765,79.885 48.765,81.537
  Bottom Layer w0.25: 47.41,18.636 47.41,19.001 ; 47.41,19.698 48.765,21.053 ; 48.765,20.76 48.765,65.965
  other v1: 48.765,79.327
NetDS1_7: DS1.7 U1.21 | length 49
  Top Layer w0.25: 49.95,18.636 50.143,18.829 ; U1.21@50.035,79.885 50.035,81.537
  Bottom Layer w0.25: 49.95,18.636 49.993,18.678 ; 49.993,18.99 49.993,66.055
  other v1: 50.035,79.327
NetDS1_8: DS1.8 U1.22 | length 49.1
  Top Layer w0.25: U1.22@51.302,79.885 51.302,81.534 ; 52.49,18.636 52.55,18.636 52.7,18.786
  Bottom Layer w0.25: 51.3,56.923 51.35,56.873 ; 51.3,57.227 51.3,80.163 ; 51.35,20.334 52.34,19.344 ; 51.35,20.406 51.35,43.204
  other v1: 51.3,79.327
NetJ1_A5: J1.A5 R28.B | length 27.5
  Top Layer w0.25: 7.45,53.332 10.075,53.332 ; 24.15,53.332 34.9,53.332
  Bottom Layer w0.25: 10.075,53.332 24.15,53.332
  other v1: 10.075,52.774 24.15,52.774
NetJ1_B5: J1.B5 R27.B | length 28.1
  Top Layer w0.25: 7.45,45.189 9.899,45.189 v1@10.244,45.534 ; v1@10.244,45.897 v1@10.325,45.897 ; v1@24.15,45.897 24.171,45.897 25.371,47.097 ; 25.371,49.084 34.95,49.084
  Bottom Layer w0.25: v1@10.331,45.897 v1@24.15,45.897
  other v1: 10.325,45.693 24.15,45.693
NetQ1_2: Q1.2 U1.39 | length 6.6
  Top Layer w0.25: 58.15,97.234 59.595,97.234 ; 59.595,97.609 60.325,96.879 ; 60.325,93.089 60.782,92.631 61.205,92.631 ; 60.325,94.755 60.325,97.773 ; 61.205,92.656 61.23,92.631
NetQ1_3: Q1.3 R18.B | length 6
  Top Layer w0.25: 61.23,92.277 61.415,92.277 ; Q1.3@61.415,91.626 63.95,89.091 ; R18.B@63.95,86.258 63.95,88.523
NetQ1_4: Q1.4 Q1.5 R17.B | length 2.7
  Top Layer w0.25: Q1.4@62.5,92.631 62.5,93.131 ; 62.5,94.755 64.665,94.755
NetR3_B: R3.B U1.24 | length 3.2
  Top Layer w0.25: 53.845,78.469 53.845,81.662
NetR4_A: R4.A U1.25 | length 3.2
  Top Layer w0.25: 55.115,78.469 55.115,81.662
NetR5_A: R5.A U1.27 | length 2.4
  Top Layer w0.25: 58.15,81.656 60.5,81.656
NetR6_B: R6.B U2.6 | length 3.7
  Top Layer w0.25: 36.45,36.338 37.054,36.338 ; 37.054,35.468 37.954,34.568 39.8,34.568
NetR7_A: R7.A R11.B U2.2 | length 9.7
  Top Layer w0.25: 36.45,45.173 36.45,43.773 39.625,43.773 ; 39.625,41.895 42.35,39.17 ; 42.325,36.717 42.35,36.692 42.35,37.917
NetR8_B: R8.B U2.7 | length 3.3
  Top Layer w0.25: 36.45,34.214 39.8,34.214
NetR9_B: R9.B U2.8 | length 3.7
  Top Layer w0.25: 36.45,31.382 37.056,31.382 37.956,32.282 ; 37.956,32.09 39.8,32.09
NetR10_A: R10.A U2.13 | length 7.7
  Top Layer w0.25: 36.45,24.655 39.7,24.655 41.85,26.805 ; 41.85,26.425 41.85,27.825
NetR12_B: R12.B U2.4 | length 6.3
  Top Layer w0.25: 36.45,41.295 39.338,41.295 ; 39.338,40.096 41.325,38.108 ; 41.325,36.717 41.35,36.692 ; 41.325,37.046 41.325,37.584
NetR13_A: R13.A U2.12 | length 6.2
  Top Layer w0.25: 36.45,25.717 39.9,25.717 41.35,27.167 ; 41.35,26.779 41.35,27.479
NetR14_A: R14.A U2.5 | length 5.1
  Top Layer w0.25: 36.45,38.816 40,38.816 ; 40,38.604 40.85,37.754 ; 40.85,36.692 40.85,36.992
NetR15_B: R15.B U2.9 | length 4.1
  Top Layer w0.25: 36.45,27.841 37.086,27.841 38.886,29.641 ; 38.886,31.736 39.8,31.736
NetR16_B: R16.B U2.17 | length 5.3
  Top Layer w0.25: 43.9,31.736 49.25,31.736
NetR18_A: R18.A R19.B U1.38 | length 11.7
  Top Layer w0.25: 58.15,96.525 59.315,96.525 ; 59.315,96.731 59.875,96.171 ; 59.875,88.028 59.875,94.203 ; 59.875,88.561 60.762,87.674 ; R19.B@60.762,86.661 60.811,86.612 R18.A@62.42,86.612 ; R19.B@60.762,86.966 60.762,87.526 ; R18.A@62.42,86.288 R18.A@62.45,86.258
NetR20_B: R20.B U1.6 | length 96.6
  Top Layer w0.25: 29.212,14.033 29.212,30.944 ; 29.212,17.955 37.028,10.139 ; 37.028,6.244 37.028,16.035 ; 37.028,7.164 39.01,5.182 ; 38.9,91.923 40.65,91.923
  Bottom Layer w0.25: 29.212,30.319 29.212,70.881 ; 29.212,83.072 38.9,92.76
  other v1: 29.212,29.761 38.9,91.365
NetR21_B: R21.B U1.9 | length 74.3
  Top Layer w0.25: 32.5,15.415 35.298,12.617 39.05,12.617 ; 32.5,16.158 32.5,31.86 ; v1@38.9,87.674 U1.9@40.65,87.674
  Bottom Layer w0.25: 32.475,54.748 32.475,81.89 ; 32.475,54.773 32.5,54.748 ; 32.475,81.302 v1@38.9,87.727 ; 32.5,30.319 32.5,43.168
  other v1: 32.5,29.761 38.9,87.47
NetR22_B: R22.B U1.7 | length 85.3
  Top Layer w0.25: 30.308,14.742 30.308,31.25 ; 30.308,18.527 39.05,9.785 ; 38.9,90.861 40.65,90.861 ; 39.05,8.015 39.05,10.165
  Bottom Layer w0.25: 30.308,30.319 30.308,70.707 ; 30.308,82.364 38.9,90.956
  other v1: 30.308,29.761 38.9,90.303
NetR23_B: R23.B U1.5 | length 85.7
  Top Layer w0.25: 28.116,13.679 28.116,30.994 ; 28.116,13.801 29.3,12.617 ; 29.3,7.661 29.3,16.613 ; 38.9,94.401 40.65,94.401
  Bottom Layer w0.25: 28.116,30.319 28.116,71.035 ; 28.116,83.426 38.91,94.22
  other v1: 28.116,29.761 38.9,93.843
NetR24_B: R24.B U1.8 | length 90.7
  Top Layer w0.25: 31.404,15.804 31.404,31.909 ; 31.404,17.942 38.499,10.847 44.54,10.847 ; v1@38.9,88.736 U1.8@40.65,88.736 ; 44.54,12.598 48.415,8.723 48.515,8.723 ; 48.515,8.594 48.74,8.369 ; 48.74,8.015 48.74,8.115
  Bottom Layer w0.25: 31.404,30.319 31.404,70.533 ; 31.404,82.01 38.9,89.506
  other v1: 31.404,29.761 38.9,88.532
NetU1_11: U1.11 U4.4 | length 24.2
  Top Layer w0.25: 17.3,84.842 19.31,86.852 ; 19.31,85.904 40.65,85.904
NetU1_12: U1.12 U4.3 | length 24.7
  Top Layer w0.25: U4.3@17.3,80.948 20.58,84.228 ; 20.58,85.196 40.65,85.196
NetU1_36: U1.36 U5.20 | length 34.9
  Top Layer w0.25: 45.808,70.331 45.812,70.326 52.425,70.326 ; 55.675,94.047 55.699,94.071 ; 55.699,94.047 58.126,94.047
  Bottom Layer w0.25: 52.425,70.326 52.425,91.551 ; 52.425,89.445 55.675,92.695
  other v1: 52.425,69.768 55.675,93.489
NetU1_37: U1.37 U5.4 | length 28.2
  Top Layer w0.25: 43.4,76.493 43.903,75.991 ; 43.4,77.053 43.4,78.003 ; 43.903,74.575 43.903,75.702 ; v1@55.1,95.822 55.105,95.817 58.15,95.817
  Bottom Layer w0.25: v1@43.4,77.761 43.4,83.586 ; 43.4,84.134 v1@55.1,95.834
  other v1: 43.4,77.557 55.1,95.613
V_Bat: B1.+ C8.A Q1.6 R17.A U2.14 U2.15 U2.16 | length 85.1
  Top Layer w0.25: 42.862,23.239 v1@64.662,23.239 ; 62.5,92.277 63.387,92.277 ; 63.387,92.021 63.84,91.569 64.617,91.569 ; R17.A@64.617,91.262 R17.A@64.665,91.215 ; R17.A@64.665,91.232 R17.A@64.682,91.215 ; 64.682,90.507 64.682,91.672 ; 64.682,90.524 64.7,90.507
  Top Layer w0.3: 42.35,28.22 42.85,28.22 43.425,28.22 43.9,28.695 ; 42.85,26.096 42.85,27.821 ; 43.9,30.344 43.9,30.919
  Top Layer w0.5: v1@42.825,22.655 42.825,24.73
  Bottom Layer w0.25: B1.+@8,33 cw(c8.3,33) B1.+ ; 64.7,23.593 64.7,76.693
  other v1: 4.5,18.432 8.3,18.432 12.1,18.432 42.825,22.68 64.7,23.034 4.5,24.451 8.3,24.451 12.1,24.451 64.7,89.949
V_Charger: C6.B SW3.5 U2.1 U2.20 | length 56.4
  Top Layer w0.3: 42.85,36.717 42.85,38.067 ; 42.85,39.55 44.15,39.55 ; 43.9,34.593 44.15,34.593 44.15,36.993
  Top Layer w0.6: 7.413,69.439 11.288,69.439 ; 11.288,68.652 12.625,67.315 v1@33.1,67.315 ; 44.15,38.991 44.15,41.841
  Bottom Layer w0.6: 33.1,67.744 44.15,56.694 ; v1@44.15,44.302 44.15,50.727
  other v1: 44.15,44.277 33.1,67.29
VBUS: C7.B C16.B C17.B D3.A D4.A D5.A FB1.B R7.B R12.A R15.A R16.A U2.18 U2.19 U5.15 | length 23.1
  Top Layer w0.25: 8.3,34.214 9.4,34.214 ; 9,35.984 9,36.445 ; 9,37.4 10.121,38.522 ; 9.15,28.187 9.85,27.487 10.9,27.487 ; 9.15,29.965 9.15,30.89 ; 10.121,39.525 10.783,39.525 ; v1@33.775,43.773 34.95,43.773 ; 33.8,41.295 34.95,41.295 ; 33.844,27.841 34.95,27.841 ; C17.B@42.633,63.599 C16.B@42.633,65.074 ; 42.633,64.662 42.633,66.062 ; 42.633,66.078 42.633,68.783 ; 43.9,32.09 45.375,32.09 45.6,32.315 ; 45.6,33.152 45.6,33.327 ; 45.6,33.86 46.843,35.102 ; v1@46.843,35.276 v1@46.843,35.376 ; v1@46.843,35.63 v1@46.9,35.687 ; v1@50.75,29.257 50.75,30.582
  Top Layer w0.5: 11.9,42.836 13.911,42.836 ; v1@13.911,42.507 13.936,42.482 v1@13.95,42.482
  other v1: 33.844,27.283 50.75,29.053 9.15,31.177 8.3,33.656 9,35.426 46.9,35.426 33.8,40.737 13.95,42.507 33.775,43.569 42.633,63.395
VUSB: C21.B FB1.A J1.A4 J1.B4 | length 10.8
  Top Layer w0.5: 7.45,44.606 8.95,44.606 10.45,44.606 12,44.606 ; 7.45,55.227 8.95,55.227
  Int2 (PWR) w0.5: v1@8.95,44.606 8.95,49.406
  other v1: 8.95,44.631 8.95,54.898
pads on no net: DS1.X J1.36 J1.A8 J1.B8 SW3.1 SW3.2 SW3.3 SW3.6 U1.4 U1.10 U1.15 U1.16 U1.23 U1.26 U1.28 U1.29 U1.30 U1.31 U1.32 U1.33 U1.34 U1.35 U3.4 U4.5 U4.6 U4.7 U4.8 U4.9 U4.10 U5.1 U5.2 U5.5 U5.7 U5.8 U5.9 U5.10 U5.17 U5.18 U5.19
copper on no net:
  other v2: 24.256,29.437 62.556,29.437 25.3,29.65 63.6,29.65 63.6,29.65 23.286,29.878 61.586,29.878 26.019,30.436 64.319,30.436 22.761,30.805 61.061,30.805 26.139,31.495 64.439,31.495 22.881,31.864 61.181,31.864 25.614,32.422 63.914,32.422 23.6,32.65 23.6,32.65 61.9,32.65 24.644,32.863 62.944,32.863 24.795,94.961 62.945,94.961 23.736,95.081 61.886,95.081 25.722,95.486 63.872,95.486 22.95,95.8 61.1,95.8 26.163,96.456 64.313,96.456 22.737,96.844 60.887,96.844 25.95,97.5 25.95,97.5 64.1,97.5 64.1,97.5 23.178,97.814 61.328,97.814 25.164,98.219 63.314,98.219 24.105,98.339 62.255,98.339

## Polygon pours and split planes (outlines as drawn)
VBUS on Int2 (PWR) "VBUS_L03_P034" (solid, remove dead copper, pour order 34): 0,3 0,97 cw(c3,97) 3,100 63,100 cw(c63,97) 66,97 66,3 cw(c63,3) 63,0 3,0 cw(c3,3)
+3V3 on Int2 (PWR) "Int2 (PWR)-+3V3" (solid, pour order 10): 40.561,94 ccw(c40.561,95.957) 42.517,95.957 42.517,97 42.509,100 0,100 0,0 38.5,0 38.5,28.1 3,28.1 3,61.7 26.825,61.7 ccw(c26.825,63.4) 28.525,63.4 28.525,77.85 28.525,91.8 cw(c30.725,91.8) 30.725,94 35.525,94
NetC22_B on Int2 (PWR) "NETC22_B_L03_P015" (solid, pour order 15): 0.075,45.819 0.075,62.744 13,62.744 13,53.269 13,46.769 cw(c12.05,46.769) 12.05,45.819
V_Bat on Int2 (PWR) "V_BAT_L03_P023" (solid, pour order 23): 40.275,35.5 ccw(c40.275,33.725) 38.5,33.725 38.5,28.35 2.075,28.35 2.075,39.1 23.837,39.1 43.8,39.1 cw(c43.8,37.3) 45.6,37.3 cw(c43.8,37.3) 43.8,35.5 42.05,35.5
GND on Bottom Layer "NONET_L04_P035" (solid, remove dead copper, shelved, pour order 35): 0,3 0,97 cw(c3,97) 3,100 63,100 cw(c63,97) 66,97 66,3 cw(c63,3) 63,0 3,0 cw(c3,3)
GND on Int1 (GND) "GND_L02_P033" (solid, remove dead copper, pour order 33): 0,3 0,97 cw(c3,97) 3,100 63,100 cw(c63,97) 66,97 66,3 cw(c63,3) 63,0 3,0 cw(c3,3)
GND on Top Layer "GND_L01_P032" (solid, remove dead copper, pour order 32): 0,3 0,97 cw(c3,97) 3,100 63,100 cw(c63,97) 66,97 66,3 cw(c63,3) 63,0 3,0 cw(c3,3)

## Other copper
Bottom Layer:
  region net GND: 12.1,18.475 ccw(c12.1,19.675) 13.3,19.675 13.3,26.925 ccw(c12.1,26.925) 12.1,28.125 4.5,28.125 ccw(c4.5,26.925) 3.3,26.925 3.3,19.675 ccw(c4.5,19.675) 4.5,18.475 8.3,18.475
  region net V_Bat: 12.1,28.475 ccw(c12.1,29.675) 13.3,29.675 13.3,36.925 ccw(c12.1,36.925) 12.1,38.125 4.5,38.125 ccw(c4.5,36.925) 3.3,36.925 3.3,29.675 ccw(c4.5,29.675) 4.5,28.475 8.3,28.475

## Silkscreen, mask and mechanical layers (free items; w line width, h text height)
Top Overlay:
  text "ON" at 0.529,72.304 h1.52
  text "UART" at 16.054,63.204 h1.52
  text "USB" at 9.329,63.104 h1.52
  text "OFF" at 0.304,61.054 h1.52
  text "PG" at 5.843,44.564 h1.3
  text "Charge status" at 0.225,42.669 h1.3
  text "Low Battery" at 1.318,40.594 h1.3
  text "Boot" at 59.154,25.754 h1.52
  text "Reset" at 22.854,25.654 h1.52
  text "Indoor Localization Unit" at 1.729,8.454 h1.52
  text "Syntronic 2024" at 1.729,4.95 h1.52
  text "Scan" at 47.554,3.454 h1.52
  text "Power" at 57.369,3.454 h1.52
  text "Christian Khederchah" at 1.729,1.954 h1.52
Mechanical 1:
  the board outline again, w0.1